# EAGLE board SensingPCB (EAGLE 7.2.0)
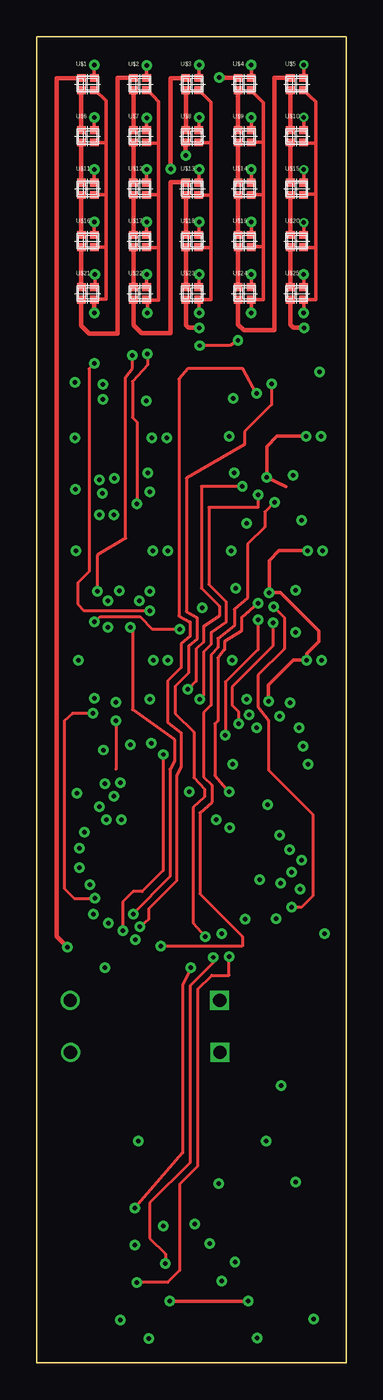
[diagram p0: board, top side]
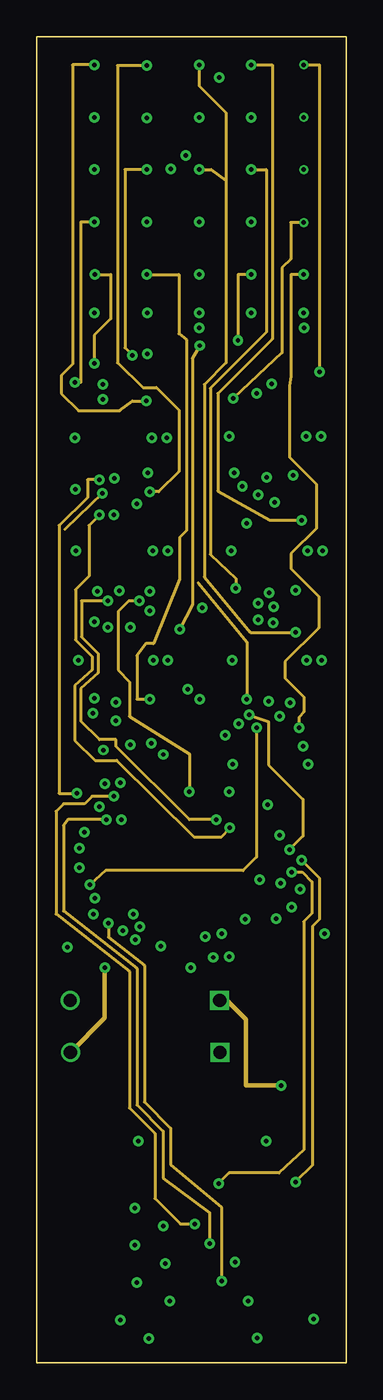
[diagram p1: board, inner layer Route2]
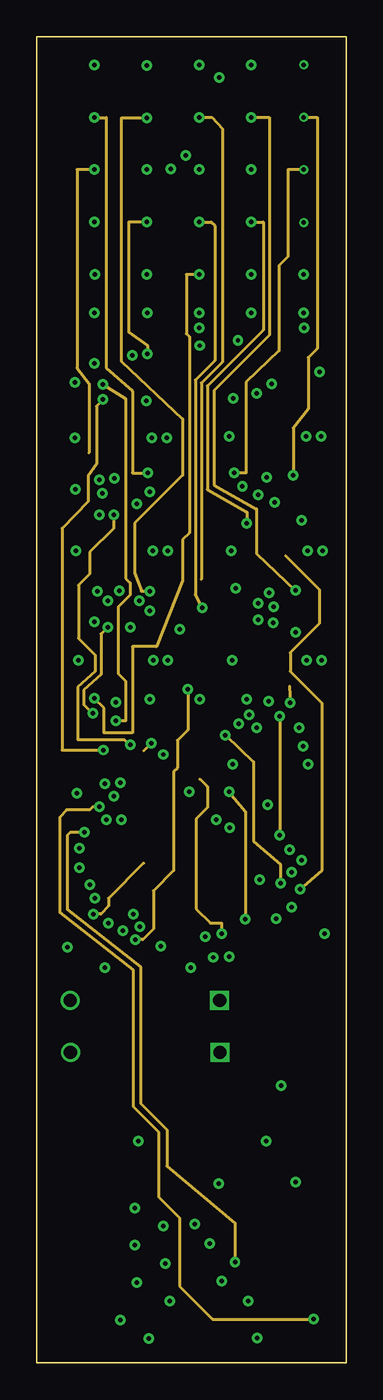
[diagram p2: board, inner layer Route3]
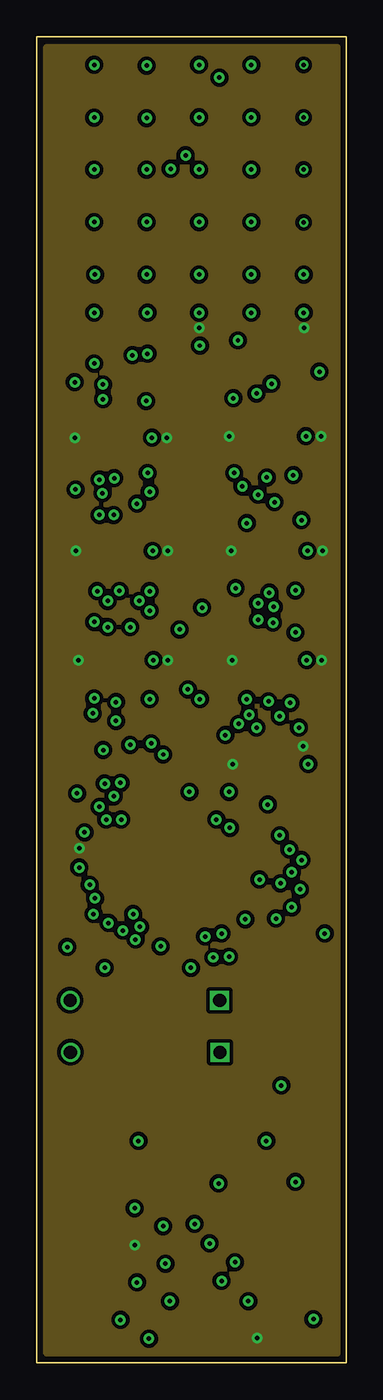
[diagram p3: board, inner layer Route14]
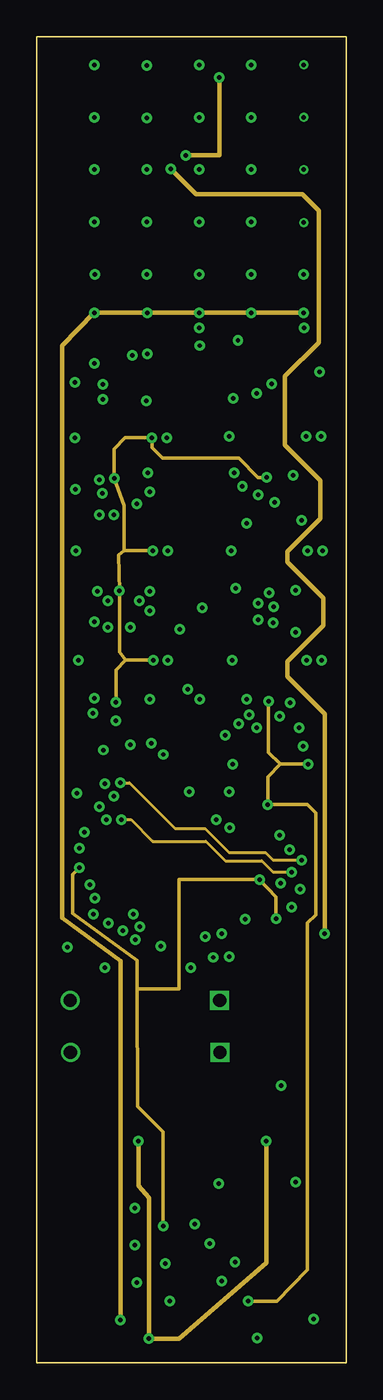
[diagram p4: board, inner layer Route15]
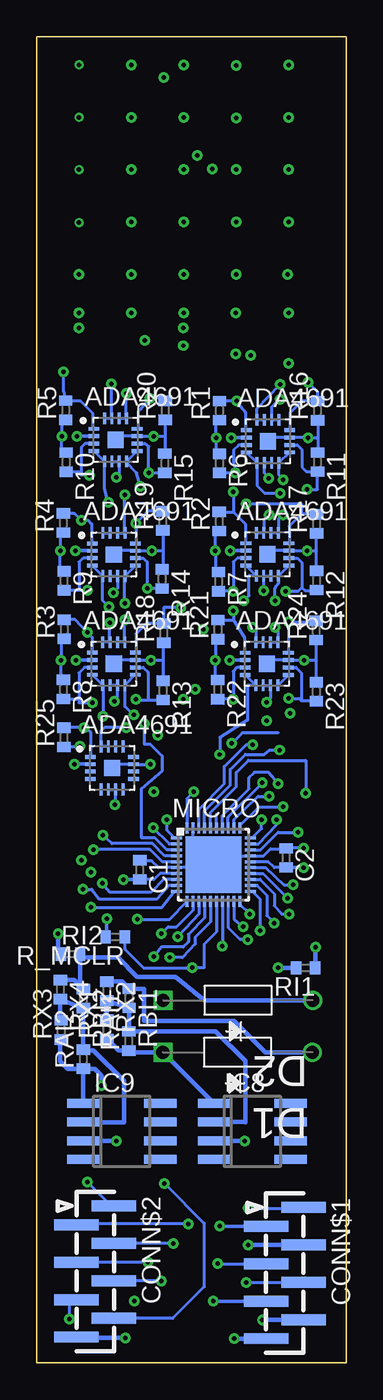
[diagram p5: board, bottom side, seen from below]

Size 21 x 89.94 mm. Coordinates in mm from the lower left corner, seen from the top.
Outline: 0,89.94 21,89.94 21,0 0,0 0,89.94
Copper layers (1+2+3*14+15+16): Top 0.035mm / dielectric 0.2mm / Route2 0.035mm / dielectric 0.36mm / Route3 0.035mm / dielectric 0.28mm / Route14 0.035mm / dielectric 0.36mm / Route15 0.035mm / dielectric 0.2mm / Bottom 0.035mm
Design rules "PCB-POOL Standard_ML6 *": minimum track width 0.15mm, minimum drill 0.3mm, track to track 0.15mm, track to pad 0.15mm, pad to pad 0.15mm, via to via 0.15mm, smd to smd 0.15mm, copper to edge 0.3mm, drill to drill 0.2mm, minimum pad ring 0.2mm, minimum via ring 0.15mm, stop-mask expansion 0.075mm, vias tented up to drill 12mil, thermal gap 0.2mm

## Footprints (pad centres in the part's own frame; a part is rotated, then mirrored left to right if it is on the bottom)
C0402 = smd 0.7 x 0.9: 1 -0.65,0; 2 0.65,0
M52-8PIN = smd 0.74 x 3: 1 -5.715,1.27; 2 -4.445,-1.27; 3 -3.175,1.27; 4 -1.905,-1.27; 5 -0.635,1.27; 6 0.635,-1.27; 7 1.905,1.27; 8 3.175,-1.27
DIO_1N457 = drill 0.889: 1 -10.16,0 | drill 0.889 square: 2 0,0
LFCSP3X3MM = smd 0.79 x 0.26: 1 -1.46,0.75; 2 -1.46,0.25; 3 -1.46,-0.25; 4 -1.46,-0.75; 9 1.46,-0.75; 10 1.46,-0.25; 11 1.46,0.25; 12 1.46,0.75 | smd 0.26 x 0.79: 5 -0.75,-1.46; 6 -0.25,-1.46; 7 0.25,-1.46; 8 0.75,-1.46; 13 0.75,1.46; 14 0.25,1.46; 15 -0.25,1.46; 16 -0.75,1.46 | smd 1.1 x 1.1: 17 0,0
SO08 = smd 0.6 x 2.2: 1 -1.905,-2.6; 2 -0.635,-2.6; 3 0.635,-2.6; 4 1.905,-2.6; 5 1.905,2.6; 6 0.635,2.6; 7 -0.635,2.6; 8 -1.905,2.6
UQFN40ML5X5MM = smd 0.75 x 0.2: 1 -2.5,1.8; 2 -2.5,1.4; 3 -2.5,1; 4 -2.5,0.6; 5 -2.5,0.2; 6 -2.5,-0.2; 7 -2.5,-0.6; 8 -2.5,-1; 9 -2.5,-1.4; 10 -2.5,-1.8; 21 2.5,-1.8; 22 2.5,-1.4; 23 2.5,-1; 24 2.5,-0.6; 25 2.5,-0.2; 26 2.5,0.2; 27 2.5,0.6; 28 2.5,1; 29 2.5,1.4; 30 2.5,1.8 | smd 0.2 x 0.75: 11 -1.8,-2.5; 12 -1.4,-2.5; 13 -1,-2.5; 14 -0.6,-2.5; 15 -0.2,-2.5; 16 0.2,-2.5; 17 0.6,-2.5; 18 1,-2.5; 19 1.4,-2.5; 20 1.8,-2.5; 31 1.8,2.5; 32 1.4,2.5; 33 1,2.5; 34 0.6,2.5; 35 0.2,2.5; 36 -0.2,2.5; 37 -0.6,2.5; 38 -1,2.5; 39 -1.4,2.5; 40 -1.8,2.5 | smd 3.8 x 3.8: TH 0,0
R0402 = smd 0.7 x 0.9: 1 -0.65,0; 2 0.65,0
CMP_PKG = smd 0.58 x 0.53: P$1 -0.44,0.415; P$2 -0.44,-0.415; P$3 0.445,0.415; P$4 0.445,-0.415

## Placement (x,y rotation side)
C1  0.1u  [C0402]  14.01,33.43 270 bottom
C2  0.1u  [C0402]  4.07,34.24 270 bottom
CONN$1  1X08  [M52-8PIN]  4.16,4.81 270 bottom
CONN$2  1X08  [M52-8PIN]  17.04,4.91 270 bottom
D1  1N457  [DIO_1N457]  12.44,21.06 180 bottom
D2  1N457  [DIO_1N457]  12.42,24.58 180 bottom
IC1  ADA4691-4  [LFCSP3X3MM]  5.3,62.5 0 bottom
IC2  ADA4691-4  [LFCSP3X3MM]  5.34,54.83 0 bottom
IC3  ADA4691-4  [LFCSP3X3MM]  15.77,47.42 0 bottom
IC4  ADA4691-4  [LFCSP3X3MM]  15.77,54.83 0 bottom
IC5  ADA4691-4  [LFCSP3X3MM]  15.66,62.6 0 bottom
IC6  ADA4691-4  [LFCSP3X3MM]  5.38,47.41 0 bottom
IC7  ADA4691-4  [LFCSP3X3MM]  15.9,40.34 0 bottom
IC8  LM334SM  [SO08]  6.37,15.69 270 bottom
IC9  LM334SM  [SO08]  15.23,15.69 270 bottom
MICRO  PIC16F19175  [UQFN40ML5X5MM]  9,33.78 0 bottom
R1  22k  [R0402]  8.59,64.59 90 bottom
R2  22k  [R0402]  8.61,57.07 90 bottom
R3  22k  [R0402]  19.14,49.75 90 bottom
R4  22k  [R0402]  19.2,56.97 90 bottom
R5  22k  [R0402]  19.04,64.61 90 bottom
R6  22k  [R0402]  8.59,61.01 270 bottom
R7  22k  [R0402]  8.66,52.99 270 bottom
R8  22k  [R0402]  19.19,45.67 270 bottom
R9  22k  [R0402]  19.15,53.04 270 bottom
R10  22k  [R0402]  19.01,61.09 270 bottom
R11  22k  [R0402]  1.94,61.09 270 bottom
R12  22k  [R0402]  2,53.07 270 bottom
R13  22k  [R0402]  12.43,45.6 270 bottom
R14  22k  [R0402]  12.49,53.17 270 bottom
R15  22k  [R0402]  12.3,61.02 270 bottom
R16  22k  [R0402]  1.94,64.58 90 bottom
R17  22k  [R0402]  2,56.91 90 bottom
R18  22k  [R0402]  12.38,49.49 90 bottom
R19  22k  [R0402]  12.44,57.11 90 bottom
R20  22k  [R0402]  12.28,64.61 90 bottom
R21  22k  [R0402]  8.7,49.73 90 bottom
R22  22k  [R0402]  8.71,45.66 270 bottom
R23  22k  [R0402]  2.02,45.51 270 bottom
R24  22k  [R0402]  2.03,49.68 90 bottom
R25  22k  [R0402]  19.16,42.41 90 bottom
R_MCLR  10k  [R0402]  15.67,28.88 180 bottom
RAI1  39  [R0402]  14.76,21.82 90 bottom
RAI2  39  [R0402]  17.84,20.59 90 bottom
RBI1  390  [R0402]  14.73,24.72 270 bottom
RBI2  390  [R0402]  17.84,24.69 270 bottom
RI1  100  [R0402]  2.74,26.78 180 bottom
RI2  100  [R0402]  18.7,27.72 0 bottom
RX1  [R0402]  16.25,22.61 90 bottom
RX2  [R0402]  16.25,25.21 270 bottom
RX3  [R0402]  19.35,22.56 90 bottom
RX4  [R0402]  19.4,25.31 270 bottom
U$1  NJL5908AR  [CMP_PKG]  3.46,86.74 0 top
U$2  NJL5908AR  [CMP_PKG]  7.01,86.74 0 top
U$3  NJL5908AR  [CMP_PKG]  10.56,86.74 0 top
U$4  NJL5908AR  [CMP_PKG]  14.11,86.74 0 top
U$5  NJL5908AR  [CMP_PKG]  17.66,86.74 0 top
U$6  NJL5908AR  [CMP_PKG]  3.46,83.19 0 top
U$7  NJL5908AR  [CMP_PKG]  7.01,83.19 0 top
U$8  NJL5908AR  [CMP_PKG]  10.56,83.19 0 top
U$9  NJL5908AR  [CMP_PKG]  14.11,83.19 0 top
U$10  NJL5908AR  [CMP_PKG]  17.66,83.19 0 top
U$11  NJL5908AR  [CMP_PKG]  3.46,79.64 0 top
U$12  NJL5908AR  [CMP_PKG]  7.01,79.64 0 top
U$13  NJL5908AR  [CMP_PKG]  10.56,79.64 0 top
U$14  NJL5908AR  [CMP_PKG]  14.11,79.64 0 top
U$15  NJL5908AR  [CMP_PKG]  17.66,79.64 0 top
U$16  NJL5908AR  [CMP_PKG]  3.46,76.09 0 top
U$17  NJL5908AR  [CMP_PKG]  7.01,76.09 0 top
U$18  NJL5908AR  [CMP_PKG]  10.56,76.09 0 top
U$19  NJL5908AR  [CMP_PKG]  14.11,76.09 0 top
U$20  NJL5908AR  [CMP_PKG]  17.66,76.09 0 top
U$21  NJL5908AR  [CMP_PKG]  3.46,72.54 0 top
U$22  NJL5908AR  [CMP_PKG]  7.01,72.54 0 top
U$23  NJL5908AR  [CMP_PKG]  10.56,72.54 0 top
U$24  NJL5908AR  [CMP_PKG]  14.11,72.54 0 top
U$25  NJL5908AR  [CMP_PKG]  17.66,72.54 0 top

## Library data of the parts
C1 C2 = eagle-ltspice; SPICEMODEL: NONE; SPICEPREFIX: C
CONN$1 CONN$2 = jt-con-harwin
D1 D2 = 1N457; AVAILABILITY: Unavailable; DESCRIPTION: 1N457 Series 500 mW 70 V Max Reverse Voltage 200 mA Small Signal Diode - DO-35; MF: ON Semiconductor; MP: 1N457; PACKAGE: DO-35 ON Semiconductor; PRICE: None
IC1-IC7 = ADA4691-4
IC8 IC9 = linear
MICRO = microchip
R1-R25 R_MCLR RAI1 RAI2 RBI1 RBI2 RI1 RI2 RX1-RX4 = resistor
U$1-U$25 = JRC

## Nets
AD1: IC1.15 IC1.16
AD2: IC2.15 IC2.16 MICRO.38
AD3: IC3.15 IC3.16 MICRO.3
AD4: MICRO.9
AD5: IC5.15 IC5.16 MICRO.13
AD6: IC1.4 IC1.5
AD7: IC2.4 IC2.5 MICRO.40
AD8: IC3.4 IC3.5 MICRO.4
AD9: IC4.4 IC4.5 MICRO.10
AD10: IC5.4 IC5.5 MICRO.17
AD11: IC1.8 IC1.9 MICRO.36
AD12: IC2.8 IC2.9 MICRO.1
AD13: IC3.8 IC3.9 MICRO.5
AD14: IC4.8 IC4.9 MICRO.11
AD15: IC5.8 IC5.9 MICRO.18
AD16: IC1.13 IC1.14 MICRO.37
AD17: IC2.13 IC2.14 MICRO.2
AD18: IC3.13 IC3.14 MICRO.8
AD19: IC4.13 IC4.14
AD20: IC5.13 IC5.14 MICRO.19
AD21: IC6.15 IC6.16 MICRO.20
AD22: IC6.4 IC6.5 MICRO.21
AD24: IC6.13 IC6.14 MICRO.24
AD25: IC7.15 IC7.16 MICRO.25
ADC1: IC1.1 R1.2 U$1.P$3
ADC2: IC2.1 R2.2 U$2.P$3
ADC3: IC3.1 R3.2 U$3.P$3
ADC4: IC4.1 R4.2 U$4.P$3
ADC5: IC5.1 R5.2 U$5.P$3
ADC6: IC1.3 R6.2 U$6.P$3
ADC7: IC2.3 R7.2 U$7.P$3
ADC8: U$8.P$3
ADC9: IC4.3 R9.2 U$9.P$3
ADC10: IC5.3 R10.2 U$10.P$3
ADC11: U$11.P$3
ADC12: IC2.10 R12.2 U$12.P$3
ADC13: U$13.P$3
ADC14: IC4.10 R14.2 U$14.P$3
ADC15: IC5.10 R15.2 U$15.P$3
ADC16: IC1.12 R16.2 U$16.P$3
ADC17: IC2.12 R17.2 U$17.P$3
ADC18: IC3.12 R18.2 U$18.P$3
ADC19: IC4.12 R19.2 U$19.P$3
ADC20: IC5.12 R20.2 U$20.P$3
ADC21: IC6.1 R21.2 U$21.P$3
ADC22: IC6.3 R22.2 U$22.P$3
ADC23: IC6.10 R23.2 U$23.P$3
ADC24: IC6.12 R24.2 U$24.P$3
ADC25: IC7.1 R25.2 U$25.P$3
GND: C1.1 C2.1 CONN$1.3 CONN$2.8 IC1.11 IC1.17 IC2.11 IC2.17 IC3.11 IC3.17 IC4.11 IC4.17 IC5.11 IC5.17 IC6.11 IC6.17 IC7.11 IC7.17 MICRO.6 MICRO.27 MICRO.39 MICRO.TH R1.1 R2.1 R3.1 R4.1 R5.1 R6.1 R7.1 R8.1 R9.1 R10.1 R11.1 R12.1 R13.1 R14.1 R15.1 R16.1 R17.1 R18.1 R19.1 R20.1 R21.1 R22.1 R23.1 R24.1 R25.1 U$23.P$2 U$25.P$2
ICSPCLK: CONN$1.5 MICRO.14
ICSPDAT: CONN$1.4 MICRO.15
MCLR: CONN$1.1 MICRO.16 R_MCLR.1
N$1: D1.2 IC8.1 RAI1.1 RX1.1
N$2: U$11.P$2 U$16.P$1
N$3: U$6.P$2 U$11.P$1
N$4: IC8.2 RAI1.2 RBI1.2 RX1.2 RX2.2
N$5: U$17.P$2 U$22.P$1
N$6: D1.1 RBI1.1 RI1.2 RX2.1
N$7: U$18.P$2 U$23.P$1
N$8: D2.2 IC9.1 RAI2.1 RX3.1
N$9: IC9.2 RAI2.2 RBI2.2 RX3.2 RX4.2
N$10: U$7.P$2 U$12.P$1
N$11: D2.1 RBI2.1 RI2.2 RX4.1
N$12: U$4.P$1 U$8.P$2
N$13: U$9.P$2 U$14.P$1
N$14: U$10.P$2 U$15.P$1
N$15: U$19.P$2 U$24.P$1
N$16: U$20.P$2 U$25.P$1
N$17: U$2.P$2 U$7.P$1
N$18: U$3.P$2 U$8.P$1
N$19: U$4.P$2 U$9.P$1
N$20: U$5.P$2 U$10.P$1
N$21: U$1.P$2 U$6.P$1
N$23: U$2.P$1 U$21.P$2
N$24: RI1.1 U$1.P$1
N$25: U$13.P$1 U$22.P$2
N$26: RI2.1 U$3.P$1
N$29: U$5.P$1 U$24.P$2
N$40: U$12.P$2 U$17.P$1
N$43: U$13.P$2 U$18.P$1
N$49: U$14.P$2 U$19.P$1
N$50: U$15.P$2 U$20.P$1
N$52: U$16.P$2 U$21.P$1
RA5: CONN$2.5 MICRO.22
RA6: CONN$2.3 MICRO.29
RA7: CONN$2.4 MICRO.28
RC2: CONN$2.2 MICRO.32
RC3: CONN$2.1 MICRO.33
RX: CONN$2.6 MICRO.31
S$1: MICRO.12
S$2: IC6.8 IC6.9
S$3: IC3.10 R13.2
S$4: IC1.10 R11.2
S$5: MICRO.35
S$6: MICRO.23
S$7: MICRO.34
S$8: IC3.3 R8.2
S$9: IC4.15 IC4.16
S$10: IC1.2 IC1.6 IC1.7 IC2.2 IC2.6 IC2.7 IC5.2 IC5.6 IC5.7 IC6.2 IC6.6 IC6.7
TX: CONN$2.7 MICRO.30
VCC_24V: CONN$1.8 IC8.3 IC9.3
VCC_NJR: CONN$1.7 U$1.P$4 U$2.P$4 U$3.P$4 U$4.P$4 U$5.P$4 U$6.P$4 U$7.P$4 U$8.P$4 U$9.P$4 U$10.P$4 U$11.P$4 U$12.P$4 U$13.P$4 U$14.P$4 U$15.P$4 U$16.P$4 U$17.P$4 U$18.P$4 U$19.P$4 U$20.P$4 U$21.P$4 U$22.P$4 U$23.P$4 U$24.P$4 U$25.P$4
VCC_OPAMP: CONN$1.6 IC3.2 IC3.6 IC3.7 IC4.2 IC4.6 IC4.7 IC7.2 IC7.6 IC7.7
VCC_PIC: C1.2 C2.2 CONN$1.2 MICRO.7 MICRO.26 R_MCLR.2

## Tracks (layer width: path | path; a pad name or v marks a point on that pad's centre or on a via)
AD1  (via drill 0.3 pad 0.71)
  Top 0.203: v5.38,43.54 5.38,40.24
  Route3 0.203: v4.49,66.35 6.04,65.4 6.04,53.2 6.34,52.89 6.34,52.08 5.53,51.27 5.53,46.74 6.04,46.24 6.04,43.54 v5.38,43.54
  Bottom 0.203: IC1.15 IC1.16 6.05,64.74 v4.49,66.35
AD2  (via drill 0.3 pad 0.71)
  Route3 0.203: v5.22,57.51 5.22,56.6 3.6,54.97 3.6,53.5 2.84,52.74 2.84,49.13 3.95,48.01 3.95,46.9 2.79,45.83 2.79,42.27 5.94,42.27 v6.34,41.92
  Bottom 0.203: IC2.16 IC2.15 5.59,57.2 v5.22,57.51 | MICRO.38 10,37.55 8.27,39.28 8.27,40.45 6.8,41.92 v6.34,41.92
AD3  (via drill 0.3 pad 0.71)
  Top 0.203: v16.05,50.2 16.05,48.62 13.25,45.83 13.25,44.61 13.71,44.15 v13.71,43.34
  Bottom 0.203: IC3.15 IC3.16 16.55,48.88 | 16.05,48.9 16.05,48.88 IC3.15 | IC3.15 16.05,48.9 | 16.05,48.9 v16.05,50.2 | MICRO.3 12.16,34.78 13,35.62 13.91,35.62 13.91,38.92 12.49,40.14 12.49,41.16 13.3,41.97 13.71,41.97 v13.71,43.34
AD4  (via drill 0.3 pad 0.71)
  Route3 0.203: 16.91,54.72 19.19,52.43 19.19,50.15 17.21,48.17 17.21,46.9 19.35,44.76 19.35,33.38 v17.87,32.11
  Bottom 0.203: MICRO.9 12.02,32.38 12.84,31.45 16.76,31.45 17.26,32.11 v17.87,32.11
AD5  (via drill 0.3 pad 0.71)
  Top 0.203: v15.94,66.4 15.94,64.98 14.11,63.15 14.11,62.29 10.15,60 10.15,50.96 10.86,50.55 10.86,49.08 10.3,48.62 10.3,46.8 9.39,45.88 9.39,44.05 10.66,42.78 10.66,39.68 11.37,38.92 11.37,38.36 10.61,37.65 10.61,29.83 v11.42,28.91
  Bottom 0.203: IC5.15 IC5.16 | v15.94,66.4 15.94,64.1 | 15.94,64.1 IC5.15 | IC5.15 15.94,64.06 15.94,64.1 | MICRO.13 10,30.43 v11.42,28.91
AD6  (via drill 0.3 pad 0.71)
  Route2 0.203: v4.46,58.99 1.92,56.55
  Bottom 0.203: IC1.5 IC1.4 | IC1.5 6.09,61.04 | IC1.5 6.05,59.51 5.53,58.99 v4.46,58.99
AD7  (via drill 0.3 pad 0.71)
  Route2 0.203: v6.95,51.67 6.24,51.67 5.53,50.96 5.53,47 6.29,46.19 6.29,43.85 10.36,41.31 v10.36,38.72
  Bottom 0.203: IC2.4 IC2.5 6.09,53.4 6.6,53.4 6.6,52.03 v6.95,51.67 | v10.36,38.72 10.8,38.27 MICRO.40
AD8  (via drill 0.3 pad 0.71)
  Route3 0.203: v16.5,43.85 v16.5,35.77
  Bottom 0.203: IC3.4 IC3.5 16.5,45.96 v16.5,43.85 | MICRO.4 12.32,34.38 13.15,35.21 15.89,35.21 v16.5,35.77
AD9  (via drill 0.3 pad 0.71)
  Top 0.203: v16.1,51.27 16.81,50.55 16.81,48.42 15.03,46.64 15.03,44.51 15.74,43.6 15.74,40.19 18.74,37.19 18.74,31.66 17.98,30.9 v17.32,30.9
  Bottom 0.203: IC4.5 IC4.4 | 16.55,53.37 IC4.5 | v16.1,51.27 16.52,51.69 IC4.5 | MICRO.10 11.66,31.98 12.49,30.9 v17.32,30.9
AD10  (via drill 0.3 pad 0.71)
  Top 0.203: v16.15,58.38 15.49,57.72 15.49,56.7 14.32,55.53 14.32,51.88 13.4,51.11 13.4,50 12.29,49.13 12.29,48.52 11.83,48.01 11.83,44.61 11.32,44.1 11.32,39.73 11.88,39.18 11.88,38.01 11.07,37.3 11.07,31.81 13.96,28.91 13.96,28.25 v8.4,28.25
  Bottom 0.203: IC5.4 IC5.5 16.41,59.29 v16.15,58.38 | MICRO.17 v8.4,28.25
AD11  (via drill 0.3 pad 0.71)
  Route2 0.203: v4.26,59.9 3.45,59.9 3.45,58.68 1.52,56.8 1.52,38.62 v2.73,38.62
  Bottom 0.203: IC1.9 IC1.8 | IC1.8 4.54,61.04 | v4.26,59.9 4.55,60.2 IC1.8 | MICRO.36 9.2,37.33 7.46,39.07 7.46,40.04 6.65,40.85 2.73,40.85 v2.73,38.62
AD12  (via drill 0.3 pad 0.71)
  Route2 0.203: v4.82,51.67 3.04,51.67 3.04,49.23 4.16,48.12 4.16,46.8 2.99,45.73 2.99,43.54 4.26,42.27 5.38,42.27 5.38,41.82 10.36,36.84 v12.18,36.84
  Bottom 0.203: IC2.9 IC2.8 4.59,52.86 4.82,52.54 v4.82,51.67 | MICRO.1 11.64,35.58 12.18,36.13 v12.18,36.84
AD13  (via drill 0.3 pad 0.71)
  Route2 0.203: v14.42,43.95 15.74,43.49 15.74,40.55 18.08,38.21 18.08,35.72 v17.16,34.81
  Bottom 0.203: IC3.9 IC3.8 | IC3.8 | MICRO.5 12.48,33.98 13.3,34.81 v17.16,34.81 | v14.42,43.95 15.02,44.5 IC3.8
AD14  (via drill 0.3 pad 0.71)
  Top 0.203: v15.03,51.52 13.91,50.55 13.91,49.64 12.74,48.93 12.74,48.37 12.29,47.81 12.29,43.54 12.08,43.34 12.08,39.84 v13.05,38.72
  Route3 0.203: v13.05,38.72 14.16,37.4 v14.16,30.08
  Bottom 0.203: IC4.9 IC4.8 v15.03,51.52 | v14.16,30.08 12,30.08 MICRO.11
AD15  (via drill 0.3 pad 0.71)
  Top 0.203: v13.96,59.44 11.17,59.44 11.17,52.54 12.39,51.32 12.39,50.66 11.32,49.95 11.32,48.88 10.81,48.42 10.81,46.24 v10.25,45.68
  Route3 0.203: v10.25,45.68 10.25,42.93 9.54,42.22 9.54,40.34 9.29,40.09 9.29,33.38 7.92,32.01 7.92,29.42 7.21,28.71 v6.7,28.71
  Bottom 0.203: IC5.9 IC5.8 14.91,61.05 14.22,60.36 v13.96,59.44 | MICRO.18 8,29.51 7.21,28.71 v6.7,28.71
AD16  (via drill 0.3 pad 0.71)
  Route3 0.203: v4.49,65.36 4.06,64.88 4.06,60.97 3.5,60.16 3.5,58.43 1.72,56.6 1.72,41.56 v4.51,41.56
  Bottom 0.203: IC1.13 IC1.14 5.05,64.85 v4.49,65.36 | MICRO.37 9.6,37.44 7.87,39.18 7.87,40.24 6.85,41.26 5.53,41.26 5.17,41.56 v4.51,41.56
AD17  (via drill 0.3 pad 0.71)
  Route2 0.203: v4.26,57.51 3.55,56.8 3.55,53.35 2.63,52.43 2.63,49.03 3.75,47.91 3.75,47 2.58,45.93 2.58,42.22 3.95,40.85 5.43,40.85 10.66,35.67 12.54,35.67 v13.1,36.28
  Bottom 0.203: IC2.14 IC2.13 4.59,57.23 v4.26,57.51 | MICRO.2 12,35.18 v13.1,36.28
AD18  (via drill 0.3 pad 0.71)
  Top 0.203: v15.03,50.4 15.03,48.37 12.79,46.19 v12.79,42.58
  Route3 0.203: v12.79,42.58 14.72,40.75 14.72,35.37 16.55,33.79 v16.55,32.52
  Bottom 0.203: IC3.13 IC3.14 | 15.03,48.88 IC3.13 | IC3.13 15.03,48.88 | 15.03,48.88 v15.03,50.4 | MICRO.8 12.38,32.78 13.25,31.91 16.05,31.91 v16.55,32.52
AD19  (via drill 0.3 pad 0.71)
  Top 0.203: v15.03,58.89 15.03,58.02 11.68,58.02 11.68,52.79 12.84,51.62 12.84,50.25 11.83,49.54 11.83,48.73 11.32,48.22 11.32,45.27 v11.07,45.02
  Bottom 0.203: IC4.14 IC4.13 | IC4.13 | IC4.13 v15.03,58.89
AD20  (via drill 0.3 pad 0.71)
  Top 0.203: v14.93,65.74 14.01,67.42 10.25,67.42 9.64,66.71 9.64,50.66 10.41,50.25 10.41,49.28 9.8,48.78 9.8,47.15 8.88,46.24 8.88,43.44 9.8,42.73 9.8,40.39 9.49,39.84 9.49,32.68 7.6,30.79 7.6,30.07 v7,29.57
  Bottom 0.203: IC5.14 IC5.13 14.93,64.06 v14.93,65.74 | MICRO.19 7.6,30.07 v7,29.57
AD21  (via drill 0.3 pad 0.71)
  Top 0.203: v6.34,49.89 6.49,49.74 6.49,44.31 9.34,42.27 9.34,40.8 9.03,40.24 9.03,32.98 8.97,32.91 v6.54,30.44
  Bottom 0.203: IC6.15 IC6.16 6.13,49.69 v6.34,49.89 | MICRO.20 7.2,31.1 v6.54,30.44
AD22  (via drill 0.3 pad 0.71)
  Top 0.203: v8.58,41.26 8.58,33.38 7.16,31.96 6.54,31.96 5.83,31.25 v5.83,29.32
  Bottom 0.203: IC6.4 IC6.5 6.7,45.95 6.7,43.6 8.58,42.43 v8.58,41.26 | MICRO.21 6.36,31.98 5.83,31.45 v5.83,29.32
AD23  (via drill 0.3 pad 0.71)
  Route3 0.203: v7.76,42.02 7.26,41.51
  Bottom 0.203: 4.62,42.73 7.05,42.73 v7.76,42.02
AD24  (via drill 0.3 pad 0.71)
  Top 0.203: v3.8,44.05 2.43,44.05 1.87,43.54 1.87,32.17 2.53,31.5 v3.95,31.5
  Route3 0.203: v4.82,49.89 4.36,49.44 4.36,46.69 3.19,45.63 3.19,44.66 v3.8,44.05
  Bottom 0.203: IC6.14 IC6.13 4.63,49.71 v4.82,49.89 | MICRO.24 5.63,33.18 v3.95,31.5
AD25  (via drill 0.3 pad 0.71)
  Route2 0.203: v14.93,43.09 14.93,34.3 14.01,33.38 4.67,33.38 v3.6,32.42
  Bottom 0.203: MICRO.25 5.47,33.58 4.21,32.42 v3.6,32.42 | v14.93,43.09 16.4,43.09 16.65,42.83 16.65,41.81 IC7.16 IC7.15 16.14,41.87
ADC1  (via drill 0.3 pad 0.71)
  Top 0.254: U$1.P$3 v3.9,88.05
  Route2 0.203: v3.9,88.05 2.43,88.05 2.43,67.73 1.67,66.96 1.67,65.74 2.84,64.58 5.63,64.58 6.49,65.24 v7.43,65.24
  Bottom 0.203: 6.8,63.25 IC1.1 6.85,63.34 6.85,64.47 v7.43,65.24 7.36,65.24 R1.2
ADC2  (via drill 0.3 pad 0.71)
  Top 0.203: U$2.P$3 v7.45,87.99 v7.46,87.99
  Top 0.254: U$2.P$3 v7.46,87.99
  Route2 0.203: v7.46,87.99 5.48,87.99 5.48,67.83 7.21,66.15 8.12,66.15 9.64,64.63 9.64,60.46 8.27,59.09 v7.66,59.09
  Bottom 0.203: R2.2 7.66,57.72 | 7.66,57.72 6.85,56.9 6.85,55.63 IC2.1 | v7.66,59.09 7.66,58.94 7.66,57.72
ADC3  (via drill 0.3 pad 0.71)
  Top 0.203: U$3.P$3 11.02,87.17 v11.02,88.05
  Top 0.254: U$3.P$3 11.02,87.15 v11.02,88.05
  Route2 0.203: v11.02,88.05 11.02,86.62 12.84,84.79 12.84,67.83 11.37,66.35 11.37,53.3 14.52,49.54 v17.57,49.54
  Bottom 0.203: IC3.1 17.23,49.2 v17.57,49.54 18.38,50.4 R3.2
ADC4  (via drill 0.3 pad 0.71)
  Top 0.254: U$4.P$3 14.57,87.15 v14.57,88.05
  Route2 0.203: v14.57,88.05 15.99,88.05 15.99,69.45 12.29,65.74 12.29,59.14 15.84,57.16 v17.98,57.16
  Bottom 0.203: IC4.1 17.26,55.61 17.26,56.9 17.52,57.16 v17.98,57.16 18.43,57.62 R4.2
ADC5  (via drill 0.3 pad 0.61, 0.3 pad 0.71)
  Top 0.203: U$5.P$3 18.13,87.18 v18.13,88.05
  Top 0.254: U$5.P$3 18.13,87.15 v18.13,88.05
  Route2 0.203: v18.13,88.05 19.19,88.05 v19.19,67.22
  Bottom 0.203: IC5.1 17.21,63.45 17.21,64.42 18.05,65.26 R5.2 19.19,65.9 v19.19,67.22
ADC6  (via drill 0.3 pad 0.71)
  Top 0.203: U$6.P$3 v3.9,84.46
  Top 0.254: U$6.P$3 v3.9,84.46
  Route3 0.203: v3.9,84.46 4.72,84.46 4.72,67.47 6.49,65.9 6.49,60.36 v7.54,60.36
  Bottom 0.203: IC1.3 7.29,62.25 7.64,61.91 7.64,61.1 7.54,60.69 v7.54,60.36 8.49,60.36 R6.2
ADC7  (via drill 0.3 pad 0.71)
  Top 0.254: U$7.P$3 v7.46,84.44
  Route3 0.203: v7.46,84.44 5.73,84.44 5.73,67.93 9.9,64.02 9.9,60.21 6.65,56.96 6.65,53.55 7.1,52.33 v7.66,52.33
  Bottom 0.203: IC2.3 7.39,54.58 7.66,54.31 v7.66,52.33 R7.2
ADC8  (via drill 0.3 pad 0.71)
  Top 0.203: U$8.P$3 11.02,83.62 v11.02,84.49
  Top 0.254: U$8.P$3 11.02,83.6 v11.02,84.49
  Route3 0.203: v11.02,84.49 11.88,84.49 12.59,83.73 12.59,67.88 11.17,66.46 11.17,53.15
ADC9  (via drill 0.3 pad 0.71)
  Top 0.254: U$9.P$3 14.57,83.6 v14.57,84.49
  Route3 0.203: v14.57,84.49 15.79,84.49 15.79,69.71 12.03,65.95 12.03,59.55 14.93,57.92 14.93,54.87 v17.57,52.38
  Bottom 0.203: IC4.3 17.86,54.58 18.13,54.31 18.13,52.38 | 18.13,52.38 R9.2 | v17.57,52.38 18.13,52.38
ADC10  (via drill 0.3 pad 0.61, 0.3 pad 0.71)
  Top 0.254: U$10.P$3 18.13,83.6 v18.13,84.49
  Route3 0.203: v18.13,84.49 19.04,84.49 19.04,68.79 18.43,68.18 18.43,64.68 17.42,63.41 v17.42,60.21
  Bottom 0.203: IC5.3 17.71,62.35 17.98,62.09 17.98,60.61 17.98,60.59 17.98,60.46 | 18.98,60.41 R10.2 18.99,60.46 17.98,60.46 | v17.42,60.21 17.98,60.21 17.98,60.46
ADC11  (via drill 0.3 pad 0.71)
  Top 0.203: U$11.P$3 v3.9,80.93
  Top 0.254: U$11.P$3 v3.9,80.93
  Route3 0.203: v3.9,80.93 2.73,80.93 2.73,67.47 3.55,66.4 3.55,61.73
ADC12  (via drill 0.3 pad 0.71)
  Top 0.203: v4.11,52.33 4.11,54.77 6.04,55.94 6.04,66.86 6.49,67.47 v6.49,68.33
  Top 0.254: U$12.P$3 v7.46,80.93
  Route2 0.203: v7.46,80.93 5.99,80.93 5.99,68.84 v6.49,68.33
  Bottom 0.203: IC2.10 3.31,54.58 2.99,54.26 2.99,52.59 | 2.99,52.59 2.79,52.38 2.04,52.38 R12.2 | v4.11,52.33 3.24,52.33 2.99,52.59
ADC13  (via drill 0.3 pad 0.71)
  Top 0.203: U$13.P$3 11.02,80.07 v11.02,80.93
  Top 0.254: U$13.P$3 11.02,80.05 v11.02,80.93
  Route2 0.203: v11.02,80.93 11.83,80.93 12.84,80.17
ADC14  (via drill 0.3 pad 0.71)
  Top 0.254: U$14.P$3 14.57,80.05 v14.57,80.93
  Route2 0.203: v14.57,80.93 15.59,80.93 15.59,69.91 11.78,66.1 11.78,54.82 13.51,53.2 v13.51,52.54
  Bottom 0.203: IC4.10 13.77,54.58 13.51,54.31 v13.51,52.54 12.51,52.54 R14.2 12.53,52.49
ADC15  (via drill 0.3 pad 0.61, 0.3 pad 0.71)
  Top 0.203: U$15.P$3 18.13,80.08 v18.13,80.93
  Top 0.254: U$15.P$3 18.13,80.05 v18.13,80.93
  Route3 0.203: v18.13,80.93 17.06,80.93 17.06,75.04 16.45,74.43 16.45,68.64 14.22,66.51 14.22,60.36 v13.4,60.36
  Bottom 0.203: IC5.10 13.67,62.35 13.4,62.14 v13.4,60.36 12.94,60.37 R15.2 12.31,60.36
ADC16  (via drill 0.3 pad 0.71)
  Top 0.203: U$16.P$3 v3.9,77.38
  Top 0.254: U$16.P$3 v3.9,77.38
  Route2 0.203: v3.9,77.38 2.99,77.38 2.99,66.51 v2.58,66.51
  Bottom 0.203: IC1.12 3.8,63.3 3.8,64.42 2.99,65.23 R16.2 1.94,65.86 v2.58,66.51
ADC17  (via drill 0.3 pad 0.71)
  Top 0.203: v7.51,68.44 7.51,67.67 6.49,66.56 6.49,64.12 6.8,63.81 v6.8,58.28
  Top 0.254: U$17.P$3 v7.46,77.38
  Route3 0.203: v7.46,77.38 6.24,77.38 6.24,69.91 7.51,69 v7.51,68.44
  Bottom 0.203: R17.2 3.04,57.56 | 3.04,57.56 3.85,56.75 3.85,55.61 IC2.12 | v6.8,58.28 3.05,58.28 3.04,57.56
ADC18  (via drill 0.3 pad 0.71)
  Top 0.203: U$18.P$3 11.02,76.52 v11.02,77.38
  Top 0.254: U$18.P$3 11.02,76.5 v11.02,77.38
  Route3 0.203: v11.02,77.38 11.83,77.38 12.08,77.12 12.08,67.98 10.76,66.66 10.76,52.13 v11.22,51.22
  Bottom 0.203: IC3.12 14.27,48.21 14.27,49.44 13.56,50.14 R18.2 12.38,51.22 v11.22,51.22
ADC19  (via drill 0.3 pad 0.71)
  Top 0.254: U$19.P$3 14.57,76.5 v14.57,77.38
  Route3 0.203: v14.57,77.38 15.38,77.38 15.38,70.06 11.57,66.25 11.57,59.24 14.27,57.72 v14.27,56.96
  Bottom 0.203: R19.2 13.46,57.76 v14.27,56.96 14.27,55.62 IC4.12
ADC20  (via drill 0.3 pad 0.61, 0.3 pad 0.71)
  Top 0.203: U$20.P$3 18.13,76.53 v18.13,77.35
  Top 0.254: U$20.P$3 18.13,76.5 v18.13,77.35
  Route2 0.203: v18.13,77.35 17.24,77.35 17.24,74.86 16.65,74.28 16.65,68.51 v13.34,65.43
  Bottom 0.203: IC5.12 14.11,63.43 14.11,64.52 14,64.64 v13.34,65.43 12.45,65.43 R20.2
ADC21  (via drill 0.3 pad 0.71)
  Top 0.203: v3.9,67.78 3.55,67.42 3.55,53.65 2.79,52.89 2.79,51.47 3.19,51.01 v7.66,51.01
  Top 0.254: U$21.P$3 3.95,72.95 v3.95,73.82
  Route2 0.203: v3.95,73.82 5.02,73.82 5.02,70.82 3.9,69.71 v3.9,67.78
  Bottom 0.203: R21.2 7.66,50.38 | 7.66,50.38 7.64,50.38 6.9,49.18 6.9,48.22 IC6.1 | v7.66,51.01 7.66,50.38
ADC22  (via drill 0.3 pad 0.71)
  Top 0.254: U$22.P$3 v7.46,73.82
  Route2 0.203: v7.46,73.82 9.64,73.82 9.64,69.81 10.15,69.4 10.15,56.45 9.7,55.99 9.7,53.15 7.92,48.78 7.41,48.78 6.8,47.96 6.8,45.02 v7.66,45.02
  Bottom 0.203: IC6.3 7.4,47.16 7.66,46.9 v7.66,45.02 R22.2
ADC23  (via drill 0.3 pad 0.71)
  Top 0.254: U$23.P$3 11.02,72.95 v11.02,73.82
  Route3 0.203: v11.02,73.82 10.15,73.82 10.15,69.81 10.36,69.6 10.36,56.3 9.9,55.84 9.9,53.04 8.12,48.57 6.49,48.57 6.49,42.73 4.56,42.73 4.56,44.41 v3.9,45.07
  Bottom 0.203: IC6.10 3.41,47.16 3.04,46.8 3.04,45.07 | 3.04,45.07 3.04,44.92 2.02,44.92 R23.2 | v3.9,45.07 3.04,45.07
ADC24  (via drill 0.3 pad 0.71)
  Top 0.203: U$24.P$3 14.57,72.97 v14.57,73.82 | v13.66,69.35 13.1,69 v11.07,69 | v9.7,49.74 7.87,49.74 7,50.61 4.31,50.61 v3.9,50.25
  Top 0.254: U$24.P$3 14.57,72.95 v14.57,73.82
  Route2 0.203: v14.57,73.82 13.66,73.82 v13.66,69.35 | v11.07,69 10.56,68.13 10.56,51.42 v9.7,49.74
  Bottom 0.203: IC6.12 3.9,48.18 v3.9,50.25 2.11,50.25 R24.2
ADC25  (via drill 0.3 pad 0.71)
  Top 0.254: U$25.P$3 18.13,72.95 v18.13,73.82
  Route2 0.203: v18.13,73.82 17.26,73.82 17.26,66.91 17.16,66.25 17.16,61.43 18.99,59.6 18.99,56.6 17.26,54.87 17.26,53.86 19.14,51.98 19.14,49.84 16.86,47.56 16.86,46.44 18.13,45.17 18.13,44.15 17.8,43.77 v17.8,43.09
  Bottom 0.203: IC7.1 17.36,42.78 v17.8,43.09 19.16,43.09 R25.2
GND  (via drill 0.3 pad 0.71)
  Top 0.305: U$23.P$2 10.12,70.4 10.3,70.21 v11.04,70.21 | U$25.P$2 17.22,70.41 17.42,70.21 v18.15,70.21
  Bottom 0.203: IC7.17 15.64,40.59 IC7.11 v13.3,40.59 v13.3,40.6 | IC5.17 15.41,62.85 IC5.11 v13.07,62.85 | IC4.17 15.52,55.08 IC4.11 v13.2,55.08 | IC1.17 5.05,62.75 IC1.11 v2.58,62.75 1.92,62.75 | IC6.17 5.13,47.66 IC6.11 v2.84,47.66 | IC2.17 5.09,55.08 IC2.11 2.79,55.08 2.84,55.08 v2.66,55.08 2,55.08 | v13.25,47.67 IC3.11 15.28,47.66 15.53,47.42 IC3.17 | v13.25,47.67 v13.25,47.66 | v2.84,47.66 | v13.2,55.08 | v13.07,62.85 | R16.1 1.92,63.91 1.92,62.75 | R11.1 1.92,61.81 1.92,62.65 1.92,62.75 | R6.1 8.83,61.9 v8.83,62.75 8.83,63.7 R1.1 | R20.1 12.3,63.96 12.3,62.85 | 12.3,62.85 R15.1 | v13.07,62.85 12.3,62.85 | R5.1 19.3,63.96 v19.3,62.85 19.3,61.74 R10.1 | R12.1 2,55.08 | 2,55.08 R17.1 | 8.66,56.37 R2.1 8.88,56.14 v8.88,55.08 8.88,53.86 R7.1 | R18.1 12.43,48.84 12.43,47.67 | 12.43,47.67 R13.1 | v13.25,47.67 12.43,47.67 | R8.1 19.35,46.32 v19.35,47.66 19.35,49.1 R3.1 | R23.1 2.02,47.66 | 2.02,47.66 2.02,49.01 R24.1 | v2.84,47.66 2.02,47.66 | 8.7,46.33 R22.1 8.88,46.31 v8.88,47.66 8.88,49.08 R21.1 | R19.1 12.44,55.08 | 12.44,55.08 12.44,53.87 R14.1 | v13.2,55.08 12.45,55.08 12.44,55.08 | R9.1 19.4,53.69 v19.4,55.08 19.4,56.32 R4.1 | R25.1 19.11,41.82 v18.08,41.82 | 8.4,34.38 MICRO.TH 9.2,33.58 MICRO.6 12.74,33.58 13.2,34.04 13.62,34.04 C1.1 | 8.4,34.38 MICRO.27 5.6,34.38 5.12,34.86 4.51,34.86 C2.1 4.36,34.91 v2.89,34.91 | 8.4,34.38 10.4,34.38 MICRO.39
  Bottom 0.254: 18.25,1.69 CONN$2.8
  Bottom 0.305: v14.98,1.69 18.25,1.69 | v6.65,7.98 CONN$1.3
  pour Route14 (isolate 0.254): 0.65,89.26 20.41,89.26 20.41,0.62 0.65,0.62
ICSPCLK  (via drill 0.3 pad 0.71)
  Top 0.203: v13.05,27.54 13.05,26.27 11.88,26.27 10.91,25.31 10.91,13.32 9.7,12.1 9.7,6.26 8.88,5.44 v6.8,5.44
  Bottom 0.203: MICRO.14 9.6,30.17 10.71,29.07 10.71,28.56 11.07,28.2 12.54,28.2 v13.05,27.54 | v6.8,5.44 CONN$1.5
ICSPDAT  (via drill 0.3 pad 0.71)
  Top 0.203: v11.98,27.49 11.98,27.14 10.41,25.56 10.41,13.57 7.66,10.83 7.66,8.44 8.73,7.37 v8.73,6.71
  Bottom 0.203: MICRO.15 9.2,29.91 10.25,28.86 10.25,28.41 11.12,27.49 v11.98,27.49 | v8.73,6.71 CONN$1.4
MCLR  (via drill 0.3 pad 0.71)
  Top 0.203: v10.46,26.78 9.9,25.61 9.9,14.23 v6.65,10.47
  Bottom 0.203: MICRO.16 8.8,29.22 9.64,28.38 9.64,26.78 v10.46,26.78 13.76,26.78 15.02,28.04 R_MCLR.1 | v6.65,10.47 2.94,10.47 CONN$1.1
N$1
  Bottom 0.305: IC8.1 8.98,17.59 D1.2 14.76,21.06 RAI1.1 15.45,21.17 RX1.1
N$2
  Top 0.305: U$11.P$2 U$16.P$1
N$3
  Top 0.305: U$6.P$2 U$11.P$1
N$4
  Bottom 0.305: IC8.2 6.86,16.32 6.85,16.32 6.85,20.48 8.88,22.46 RAI1.2 14.73,22.47 RBI1.2 RX2.2 RX1.2
N$5
  Top 0.305: U$17.P$2 U$22.P$1
N$6  (via drill 0.3 pad 0.71)
  Route2 0.305: v4.61,26.78 4.61,23.38 D1.1
  Bottom 0.305: D1.1 5.5,21.06 7.61,23.17 13.71,23.17 13.71,25.36 14.73,25.36 RBI1.1 15.22,25.86 RX2.1 | RI1.2 v4.61,26.78
N$7
  Top 0.305: U$18.P$2 U$23.P$1
N$8  (via drill 0.3 pad 0.71)
  Route2 0.305: v16.6,18.8 14.22,18.8 14.22,23.28 12.91,24.58 D2.2
  Bottom 0.305: RAI2.1 17.84,17.59 IC9.1 | v16.6,18.8 16.6,19.47 17.06,19.92 17.82,19.92 RAI2.1 | RAI2.1 18.91,19.94 19.4,20.43 19.4,21.86 RX3.1
N$9
  Bottom 0.305: IC9.2 15.08,16.32 15.08,19.11 17.16,21.19 17.79,21.19 RAI2.2 RBI2.2 RX4.2 19.4,23.26 RX3.2
N$10
  Top 0.305: U$7.P$2 U$12.P$1
N$11
  Bottom 0.305: D2.1 9.62,24.58 11.57,26.17 14.2,26.17 15.49,27.49 18.05,27.49 | 18.05,27.49 RI2.2 | RX4.1 18.46,25.96 RBI2.1 18.05,25.55 18.05,27.49
N$12  (via drill 0.3 pad 0.71)
  Top 0.305: U$8.P$2 10.1,82.77 v10.1,81.9 | v12.39,87.18 13.67,87.18 U$4.P$1
  Route15 0.305: v10.1,81.9 12.39,81.9 v12.39,87.18
N$13
  Top 0.305: U$9.P$2 U$14.P$1
N$14
  Top 0.305: U$10.P$2 U$15.P$1
N$15
  Top 0.305: U$19.P$2 U$24.P$1
N$16
  Top 0.305: U$20.P$2 U$25.P$1
N$17
  Top 0.305: U$2.P$2 U$7.P$1
N$18
  Top 0.305: U$3.P$2 U$8.P$1
N$19
  Top 0.305: U$4.P$2 U$9.P$1
N$20
  Top 0.305: U$5.P$2 U$10.P$1
N$21
  Top 0.305: U$1.P$2 U$6.P$1
N$23
  Top 0.305: U$21.P$2 3.02,70.34 3.55,69.81 5.48,69.81 5.48,87.18 6.57,87.18 U$2.P$1
N$24  (via drill 0.3 pad 0.71)
  Top 0.305: U$1.P$1 1.36,87.15 1.36,28.91 v2.08,28.2
  Bottom 0.305: v2.08,28.2 2.08,26.8 RI1.1
N$25
  Top 0.305: U$22.P$2 6.57,70.4 7.1,69.86 9.09,69.86 9.09,80.07 10.12,80.07 U$13.P$1
N$26  (via drill 0.3 pad 0.71)
  Top 0.305: U$3.P$1 9.09,87.15 v9.09,80.98
  Route15 0.305: v9.09,80.98 10.81,79.26 18.03,79.26 19.14,78.14 19.14,69.2 16.86,66.91 16.86,62.24 19.25,59.85 19.25,57.26 17.01,55.03 17.01,54.31 19.45,51.88 19.45,50 17.01,47.56 17.01,46.54 19.55,44 v19.55,29.12
  Bottom 0.305: v19.55,29.12 19.55,27.66 RI2.1
N$29
  Top 0.305: U$24.P$2 13.67,70.41 14.06,70.06 16.15,70.06 16.15,87.18 17.22,87.18 U$5.P$1
N$40
  Top 0.305: U$12.P$2 U$17.P$1
N$43
  Top 0.305: U$13.P$2 U$18.P$1
N$49
  Top 0.305: U$14.P$2 U$19.P$1
N$50
  Top 0.305: U$15.P$2 U$20.P$1
N$52
  Top 0.305: U$16.P$2 U$21.P$1
RA5  (via drill 0.3 pad 0.71)
  Route2 0.203: v4.87,29.83 4.87,28.86 7.31,26.93 7.31,17.69 9.09,15.91 9.09,13.42 12.54,10.52 v12.54,5.55
  Bottom 0.203: MICRO.22 6.05,32.38 5.38,31.71 5.38,30.34 v4.87,29.83 | v12.54,5.55 CONN$2.5
RA6  (via drill 0.3 pad 0.71)
  Route2 0.203: v4.72,36.84 2.13,36.84 1.82,36.43 1.82,30.64 6.8,26.73 6.8,17.48 8.58,15.71 8.58,12.51 11.73,10.17 v11.73,8.09
  Bottom 0.203: MICRO.29 5.97,35.18 4.72,36.48 v4.72,36.84 | v11.73,8.09 CONN$2.3
RA7  (via drill 0.3 pad 0.71)
  Route3 0.203: v3.24,35.98 2.28,35.98 2.08,35.77 2.08,30.74 7.05,26.83 7.05,17.59 8.83,15.81 8.83,13.32 13.45,9.46 v13.45,6.82
  Bottom 0.203: MICRO.28 5.81,34.78 4.62,35.98 v3.24,35.98 | v13.45,6.82 CONN$2.4
RC2  (via drill 0.3 pad 0.71)
  Route2 0.203: v5.22,38.41 3.75,38.41 3.24,37.91 1.82,37.91 1.31,37.4 1.31,30.44 6.29,26.53 6.29,17.28 8.02,15.55 8.02,11.13 9.75,9.41 v10.71,9.41
  Bottom 0.203: MICRO.32 7.6,36.85 5.99,38.41 v5.22,38.41 | v10.71,9.41 18.25,9.41 CONN$2.2
RC3  (via drill 0.3 pad 0.71)
  Route2 0.203: v17.98,34.1 19.19,32.88 19.19,30.08 18.74,29.63 18.74,13.42 v17.57,12.25
  Route15 0.203: v5.68,39.33 6.29,39.33 9.39,36.23 11.42,36.23 13.05,34.6 15.54,34.6 16.05,34.1 v17.98,34.1
  Bottom 0.203: MICRO.33 8,37.01 v5.68,39.33 | v17.57,12.25 15.94,10.63 CONN$2.1
RX  (via drill 0.3 pad 0.71)
  Route3 0.203: v4.26,37.7 3.8,37.7 3.6,37.5 2.02,37.5 1.57,36.99 1.57,30.54 6.54,26.63 6.54,17.38 8.27,15.66 8.27,11.24 9.7,9.81 9.7,5.19 11.93,2.96 v18.79,2.96
  Bottom 0.203: MICRO.31 7.2,36.43 5.94,37.7 v4.26,37.7 | 18.79,4.17 18.89,4.28 | CONN$2.6 18.3,4.17 18.79,4.17 | 18.79,4.17 v18.79,2.96
S$1  (via drill 0.3 pad 0.71)
  Route3 0.203: 11.07,39.58 11.57,39.07 11.57,37.65 10.81,36.89 10.81,30.79 11.78,29.83 12.54,29.83 v12.54,29.12
  Bottom 0.203: MICRO.12 10.4,30.69 11.52,29.57 12.08,29.57 v12.54,29.12
S$2
  Bottom 0.203: IC6.9 IC6.8 4.62,45.93
S$3  (via drill 0.3 pad 0.71)
  Route2 0.203: 10.96,52.89 14.27,48.88 v14.27,45.02
  Bottom 0.203: IC3.10 13.78,47.17 13.45,46.85 13.45,44.97 | v14.27,45.02 14.22,44.97 13.45,44.97 | R13.2 12.45,44.97 13.45,44.97
S$4  (via drill 0.3 pad 0.71)
  Bottom 0.203: IC1.10 3.31,62.25 2.99,61.93 2.99,60.77 2.68,60.46 1.9,60.46 R11.2 1.94,59.24 v2.63,59.24
S$5
  Bottom 0.203: MICRO.35 8.8,37.22
S$6  (via drill 0.3 pad 0.71)
  Route3 0.203: 7.26,33.89 4.87,31.5 4.87,31 4.36,30.44 v3.85,30.44
  Bottom 0.203: MICRO.23 5.84,32.78 4.87,31.81 4.87,31 4.36,30.44 v3.85,30.44
S$7  (via drill 0.3 pad 0.71)
  Bottom 0.203: MICRO.34 8.4,37.11 6.6,38.92 6.6,39.68 6.24,40.04 5.28,40.04 v4.62,39.28
S$8  (via drill 0.3 pad 0.71)
  Route3 0.203: 17.16,45.88 v17.21,44.76
  Bottom 0.203: IC3.3 17.76,47.17 18.13,46.8 18.13,45.02 | R8.2 18.13,45.02 | v17.21,44.76 18.13,44.76 18.13,45.02
S$9
  Bottom 0.203: IC4.16 IC4.15
S$10  (via drill 0.3 pad 0.71)
  Top 0.254: v18.28,62.85 16.3,62.85 15.61,62.16 v15.61,60.05 16.91,59.42
  Route15 0.254: v15.61,60.05 15.03,60.05 13.71,61.38 8.53,61.38 7.82,62.09 v7.82,62.75 5.99,62.75 5.25,61.96 v5.25,60 5.94,58.15 5.94,55.08 | v7.87,55.08 5.94,55.08 | 5.94,55.08 5.55,54.8 v5.61,52.36 5.61,48.19 6.04,47.66 | v7.92,47.66 6.04,47.66 | 6.04,47.66 5.38,47 v5.38,44.81
  Bottom 0.203: IC5.2 | IC5.6 IC5.7 | IC5.7 | IC5.7 15.41,60.26 v15.61,60.05 | 5.07,61.04 IC1.7 IC1.6 5.55,60.36 v5.25,60 | IC2.2 6.81,55.08 | IC2.7 IC2.6 5.61,53.36 v5.61,52.36 | IC6.2 | IC6.6 IC6.7 5.12,45.07 v5.38,44.81
  Bottom 0.254: IC5.2 v18.28,62.85 | IC1.2 6.75,62.75 v7.82,62.75 | 6.81,55.08 v7.87,55.08 | IC6.2 v7.92,47.66
TX  (via drill 0.3 pad 0.71)
  Route2 0.203: v17.32,33.28 18.03,33.28 18.69,32.62 18.69,30.49 18.13,29.93 18.13,14.44 16.45,12.86 13.05,12.86 v12.34,12.15
  Route15 0.203: v5.73,36.84 6.39,36.84 7.87,35.37 11.47,35.37 12.79,34.04 15.28,34.04 16.05,33.28 v17.32,33.28
  Bottom 0.203: MICRO.30 6.38,35.58 5.73,36.23 v5.73,36.84 | v12.34,12.15 9.64,9.46 9.64,5.14 11.78,3.01 CONN$2.7
VCC_24V  (via drill 0.3 pad 0.71)
  Route15 0.305: v6.9,15.05 6.9,12 7.61,11.18 v7.61,1.63 9.64,1.63 15.59,6.77 v15.59,15.05
  Bottom 0.305: CONN$1.8 v7.61,1.63 | IC8.3 6.9,15.05 v6.9,15.05 | IC9.3 16.25,15.05 v15.59,15.05
VCC_NJR  (via drill 0.3 pad 0.71)
  Top 0.254: U$1.P$4 3.95,86.32 4.72,85.61 4.72,82.76 | 4.72,82.76 4.72,79.26 | 4.72,79.26 4.72,75.65 | U$6.P$4 4.71,82.77 4.72,82.76 | U$11.P$4 4.68,79.22 4.72,79.26 | U$16.P$4 4.69,75.67 4.72,75.65 | 4.72,75.65 4.72,72.14 3.9,72.14 U$21.P$4 | U$2.P$4 7.56,86.32 8.27,85.56 8.27,82.74 | 8.27,82.74 8.27,79.23 | 8.27,79.23 8.27,75.62 | 8.27,75.62 8.27,72.09 7.51,72.09 | U$22.P$4 7.45,72.09 7.51,72.09 | 7.51,72.09 v7.51,71.23 | U$3.P$4 11.83,85.5 11.83,82.76 | 11.83,82.76 11.83,79.21 | 11.83,79.21 11.83,75.65 | 11.83,75.65 11.83,72.2 11.83,72.12 U$23.P$4 11.02,72.11 v11.02,71.23 | U$4.P$4 15.38,85.49 15.38,82.79 | 15.38,82.79 15.38,79.23 | 15.38,79.23 15.38,75.7 | 15.38,75.7 15.38,72.2 15.39,72.12 U$24.P$4 14.57,72.1 v14.57,71.23 | U$5.P$4 18.94,85.53 18.94,82.74 | 18.94,82.74 18.94,79.28 | 18.94,79.28 18.94,75.65 | 18.94,75.65 18.94,72.12 18.87,72.12 U$25.P$4 18.13,72.1 v18.13,71.23 | U$7.P$4 7.49,82.74 8.27,82.74 | U$12.P$4 7.46,79.23 8.27,79.23 | U$17.P$4 7.5,75.62 8.27,75.62 | U$18.P$4 11.02,75.65 11.83,75.65 | U$13.P$4 11.02,79.21 11.83,79.21 | U$8.P$4 11.01,82.76 11.83,82.76 | U$9.P$4 14.57,82.79 15.38,82.79 | U$14.P$4 15.38,79.23 | U$19.P$4 14.58,75.7 15.38,75.7 | U$20.P$4 18.12,75.65 18.94,75.65 | U$15.P$4 18.16,79.28 18.94,79.28 | U$10.P$4 18.14,82.74 18.94,82.74
  Top 0.305: U$21.P$4 v3.9,71.23
  Route15 0.305: v5.68,2.9 5.68,27.24 1.72,30.18 1.72,69 v3.9,71.23 v7.51,71.23 v11.02,71.23 v14.57,71.23 v18.13,71.23
  Bottom 0.305: CONN$1.7 v5.68,2.9
VCC_OPAMP  (via drill 0.3 pad 0.71)
  Top 0.254: v18.38,55.08 16.45,55.08 15.79,54.42 v15.79,52.23 16.55,52.23 19.14,49.64 19.14,48.93 18.33,48.12 v18.33,47.66 17.42,47.66 15.74,45.98 v15.74,44.87 | v14.37,4.17 v9.03,4.17
  Route15 0.254: v18.43,40.6 16.55,40.6 | 16.55,40.6 15.69,39.73 v15.69,37.85 18.38,37.85 18.94,37.3 18.94,30.39 18.38,29.83 18.38,6.31 16.3,4.17 v14.37,4.17 | 16.55,40.6 15.74,41.41 v15.74,44.87
  Bottom 0.203: IC3.6 15.54,45.96 | IC3.7 15.54,45.96 | IC4.6 IC4.7 15.52,52.5 v15.79,52.23 | IC7.6 IC7.7 15.69,38.88 v15.69,37.85 | 15.54,45.96 15.54,45.07 v15.74,44.87 | IC4.2 | IC3.2 | IC7.2
  Bottom 0.254: IC4.2 v18.38,55.08 | IC3.2 v18.33,47.66 | IC7.2 v18.43,40.6 | v9.03,4.17 CONN$1.6
VCC_PIC  (via drill 0.3 pad 0.71)
  Route15 0.254: 6.81,25.36 6.8,27.29 2.43,30.49 2.43,33.13 v2.89,33.59 | 6.81,25.36 6.85,17.38 8.58,15.66 v8.58,9.25 | 6.81,25.36 9.64,25.36 9.64,32.77 v15.13,32.77 16.25,31.61 v16.25,30.13
  Bottom 0.203: MICRO.7 12.64,33.18 13.05,32.77 13.65,32.77 C1.2 | C2.2 4.87,33.59 5.28,33.98 MICRO.26 | 16.25,28.63 R_MCLR.2
  Bottom 0.254: v8.58,9.25 CONN$1.2 | v2.89,33.59 4.38,33.59 C2.2 | v15.13,32.77 13.66,32.77 C1.2 | v16.25,30.13 16.25,28.88 R_MCLR.2